# Altium PCB IR2111+IRFZ44.PcbDoc
Units mil, origin at the board's own origin, x right, y up, seen from the top; angles counter-clockwise.
Board outline 3825 x 2225 mil, 2 copper layers (Top Layer, Bottom Layer); 49 components, 32 nets, 144 pads, 82 vias.
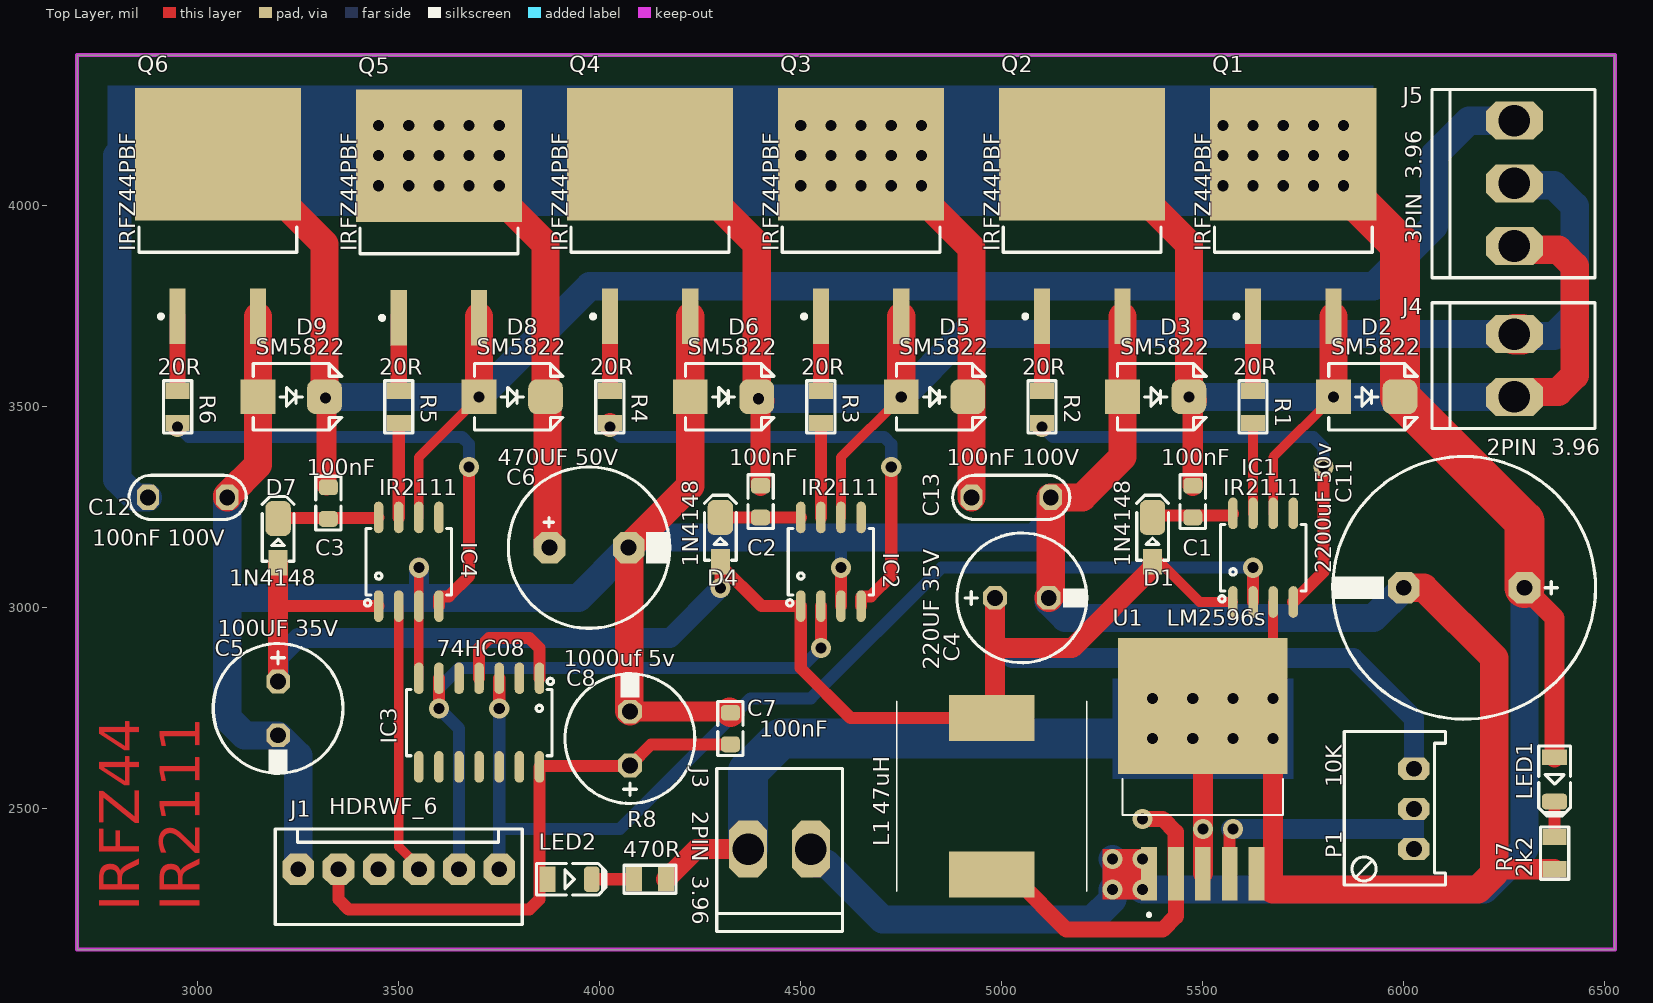
[diagram p0: Top Layer view]
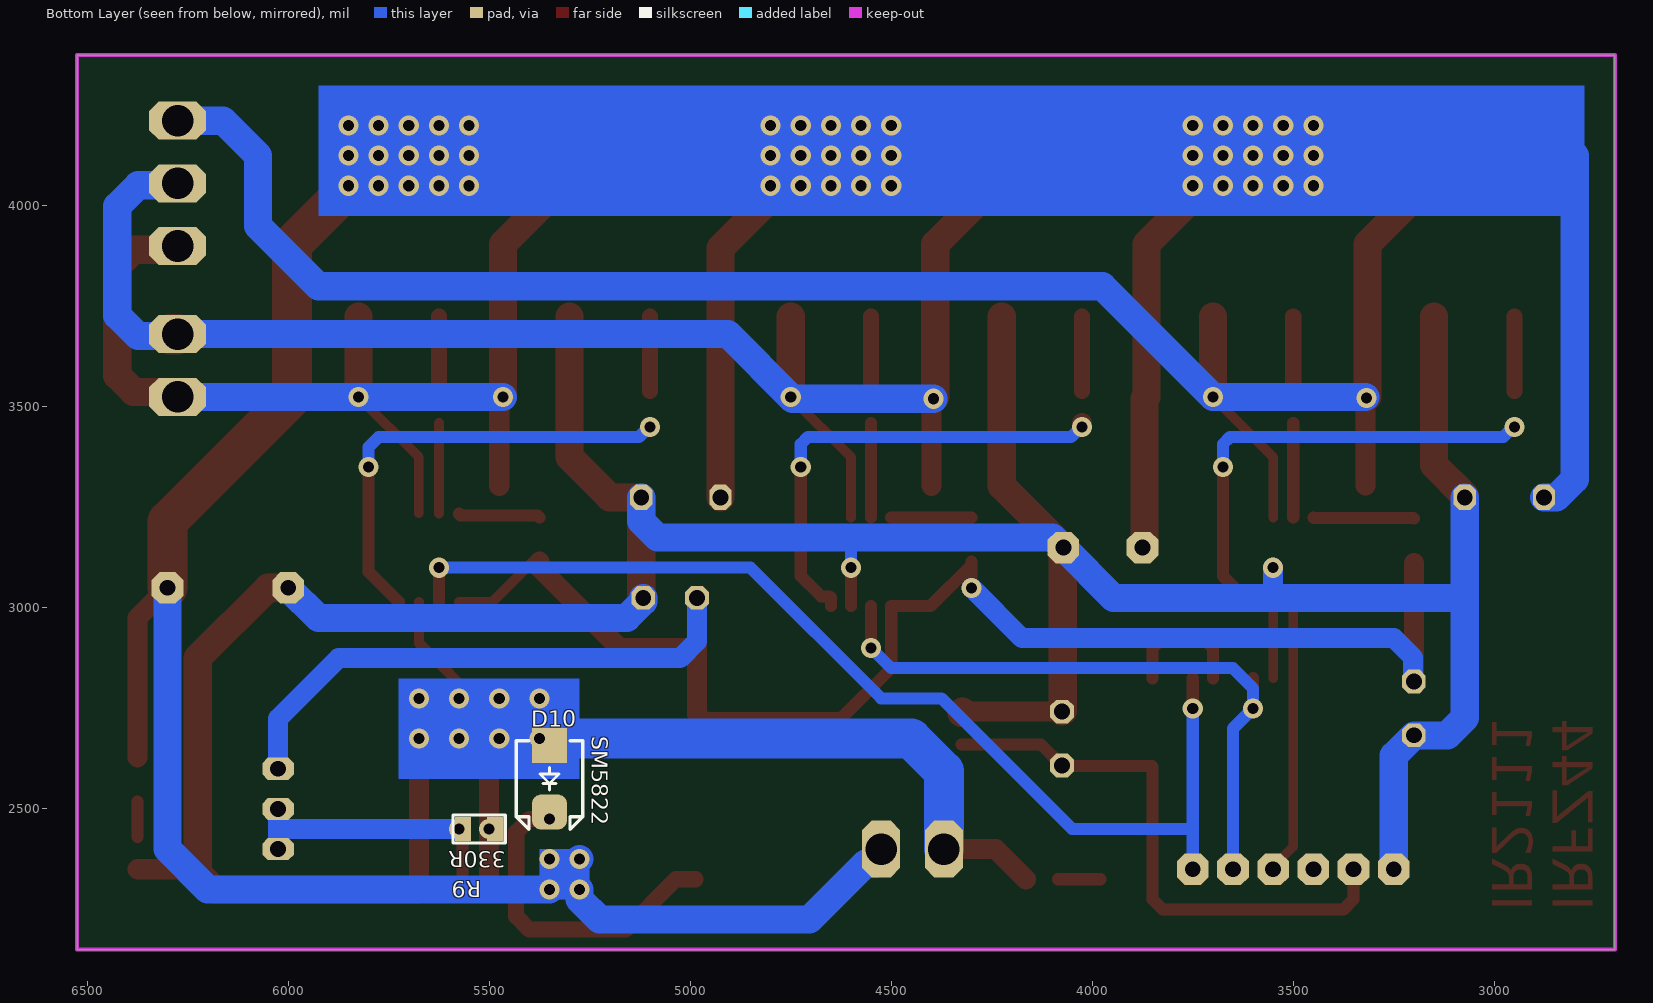
[diagram p1: Bottom Layer view, seen from below]
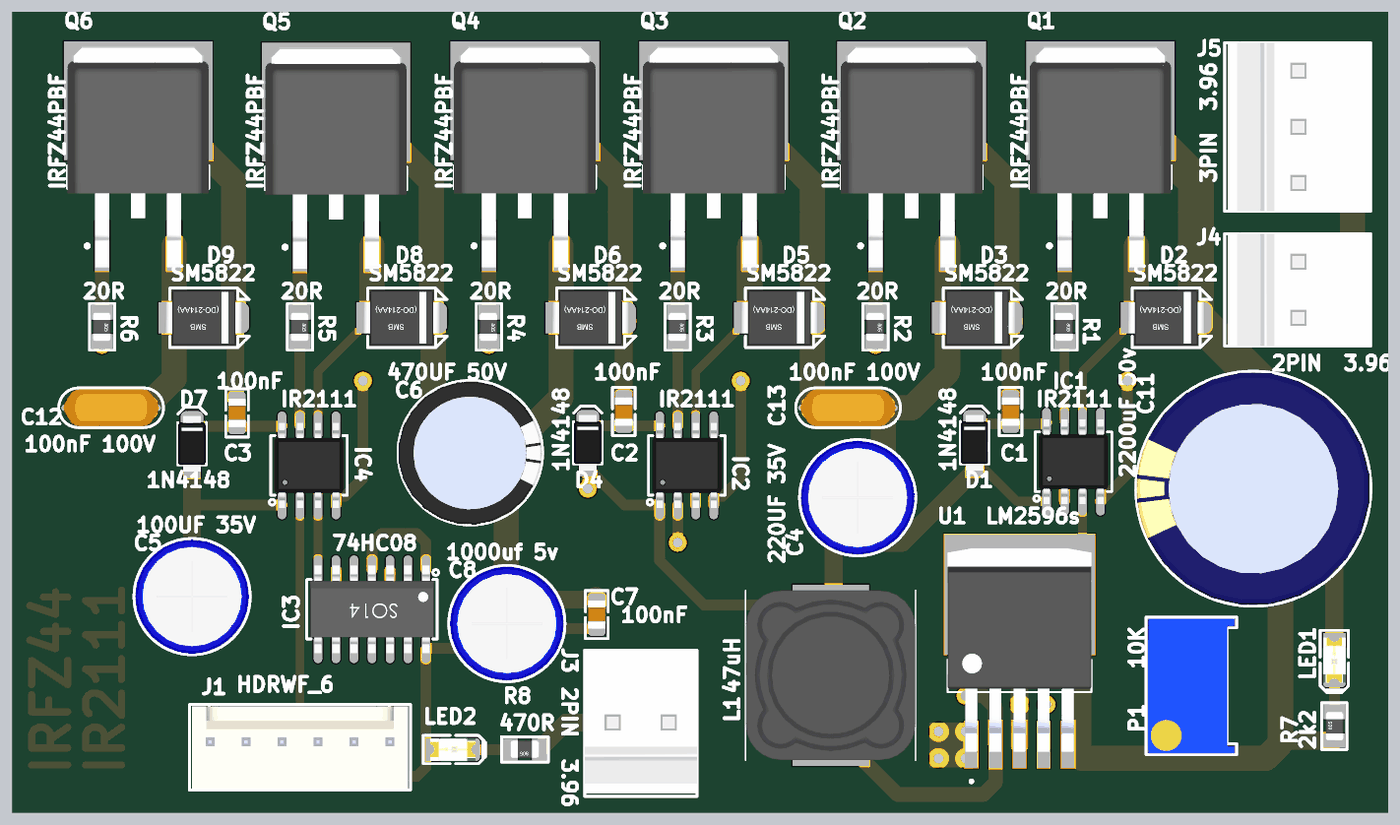
[diagram p2: 3D render of the assembled board from above, using the file's embedded part models]

## Layer stack, top to bottom
Top Solder: solder mask 0.4, Solder Resist, Dk 3.5
Top Layer: signal copper 1.4
Dielectric 1: dielectric 12.6, FR-4, Dk 4.8
Bottom Layer: signal copper 1.4
Bottom Solder: solder mask 0.4, Solder Resist, Dk 3.5

## Board outline
2700,2150 6525,2150 6525,4375 2700,4375

## Design rules (kind name [scope] priority, off if disabled: settings)
Clearance [All] p1: gap=10 ignorepadtopadclearanceinfootprint=FALSE except(0: Arc-Hole Track-Hole SMDPad-Hole THPad-Hole Via-Hole Fill-Hole Poly-Hole Region-Hole Text-Hole)
PolygonConnect [All] p1: connectstyle=Relief reliefconductorwidth=10 reliefentries=4 polygonreliefangle="90 Angle" airgapwidth=10
RoutingVias [All] p1: holewidth=28 width=50 viastyle="Through Hole" minholewidth=28 minwidth=50 maxholewidth=28 maxwidth=50
SolderMaskExpansion [All] p1: expansion=4 istentingtop=FALSE
Width [All] p1: maxlimit=100 minlimit=20 preferedwidth=40 minimp=50.000000 maximp=50.000000 favimp=50.000000
30 further rules are at their usual default settings.

## Components (designator, comment, footprint, x,y, rotation, side; value= is the part's Value field where it differs from the comment)
C1 "100nF" C0805 5475,3264.37 r270 top
C2 "100nF" C0805 4400,3264.37 r270 top
C3 "100nF" C0805 3325,3260.63 r270 top
C4 "220UF 35V" C_EL_8X12 5050,3025 r0 top
C5 "100UF 35V" C_EL_8X12 3200,2750 r270 top
C6 "470UF 50V" C_EL_10X12 3973.43,3150 r0 top
C7 "100nF" C0805 4325,2700 r270 top
C8 "1000uf 5v" C_EL_8X12 4075,2675 r90 top
C11 "2200uF 50v" C_EL_16X25 6150,3050 r180 top
C12 "100nF 100V" C_CER_D7B 2975,3275 r180 top
C13 "100nF 100V" C_CER_D7B 5023.43,3275 r180 top value=10nF
D1 "1N4148" D_SOD123W 5375,3177.76 r90 top
D2 "SM5822" D_SMB 5907.68,3525 r0 top value=?
D3 "SM5822" D_SMB 5382.68,3525 r0 top value=?
D4 "1N4148" D_SOD123W 4300,3177.76 r90 top
D5 "SM5822" D_SMB 4832.68,3525 r0 top value=?
D6 "SM5822" D_SMB 4307.68,3525 r0 top value=?
D7 "1N4148" D_SOD123W 3200,3175 r90 top
D8 "SM5822" D_SMB 3782.68,3525 r0 top value=?
D9 "SM5822" D_SMB 3232.68,3525 r0 top value=?
D10 "SM5822" D_SMB 5350,2575 r270 bottom value=?
IC1 "IR2111" SO_8 5650,3125 r90 top
IC2 "IR2111" SO_8 4575,3114.76 r90 top
IC3 "74HC08" SO_14 3700,2714.76 r270 top
IC4 "IR2111" SO_8 3525,3114.76 r90 top
J1 "HDRWF_6" WF_6 3500,2350 r180 top
J3 "2PIN  3.96" PWL_2 4447.05,2400 r180 top
J4 "2PIN  3.96" PWL_2 6275,3602.95 r90 top
J5 "3PIN  3.96" PWL_3 6275,4055.91 r90 top
L1 "47uH" CDRH127LDNP560MC-12*12 4975,2336.45 r0 top
LED1 "" LED1206RED 6375,2573.5 r270 top
LED2 "" LED1206RED 3925,2325 r0 top
P1 "10K" POT_3296W 6025,2500 r90 top
Q1 "IRFZ44PBF" D2PAK3 5725,3975 r90 top
Q2 "IRFZ44PBF" D2PAK3 5200,3975 r90 top
Q3 "IRFZ44PBF" D2PAK3 4650,3975 r90 top
Q4 "IRFZ44PBF" D2PAK3 4125,3975 r90 top
Q5 "IRFZ44PBF" D2PAK3 3600,3971.46 r90 top
Q6 "IRFZ44PBF" D2PAK3 3050,3975 r90 top
R1 "20R" R0805 5625,3500 r180 top
R2 "20R" R0805 5100,3500 r180 top
R3 "20R" R0805 4550,3500 r180 top
R4 "20R" R0805 4025,3500 r180 top
R5 "20R" R0805 3500,3500 r180 top
R6 "20R" R0805 2950,3500 r180 top
R7 "2k2" R0805 6375,2390 r0 top
R8 "470R" R0805 4125,2325 r90 top
R9 "330R" R0805 5525,2450 r270 bottom
U1 "LM2596s" "to-263-5 5d2pak LM2596S" 5500,2756.27 r90 top

## Footprints (in the part's own frame and the unit in brackets; to place one, negate y for a bottom-side part, rotate by r counter-clockwise, add the part's x,y. Pads: shape width x height; smd on the part's side, far side on the other; paste and mask are expansions set on the pad)
C0805 [mm] "CHIP Capacitor, 2.0X1.3mm, 0805"
  rrect50% 1x1.2 smd mask+0.075: 1(-1,0) 2(1,0)
  Top Layer pour cut-out: -0.5,0.8 0.5,0.8 0.5,-0.8 -0.5,-0.8
  silkscreen extent -1.7,-0.8 1.7,0.8, body extent -1,-0.62 1,0.63, height 1
C_CER_D7B [mm] "CAP, CER MULTILAYER, 7.0X2.6mm, pitch: 5.0mm"
  oct 1.4x1.6 hole 1 mask+0.075: 1(-2.5,0) 2(2.5,0)
  silkscreen extent -3.7,-1.4 3.7,1.4, body extent -3.54,-1.3 3.54,1.3, height 9.64
C_EL_8X12 [mm] "Cap Elec, D8.0X12.0H pitch: 3.5mm, RB.14/.26, RB.15/.32"
  oct 1.5x1.5 hole 1: 1(-1.7,0) 2(1.7,0)
  silkscreen extent -4.1,-4.1 4.1,4.1, body extent -4.02,-4.03 4.03,4.03, height 2.98
C_EL_10X12 [mm] "Cap Elec, D10.0X12.0H pitch: 5.0mm"
  oct 2x2 hole 1: 1(-2.5,0) 2(2.5,0)
  silkscreen extent -5.1,-5.1 5.1,5.1, body extent -5.07,-5.08 5.05,5.04, height 13.7
C_EL_16X25 [mm] "Cap Elec, D16.0X25.0H pitch: 7.6mm, RB.3/.6"
  oct 2x2 hole 1: 1(-3.81,0) 2(3.81,0)
  silkscreen extent -8.3,-8.3 8.3,8.3, body extent -8.24,-8.24 8.25,8.24, height 25.4
CDRH127LDNP560MC-12*12 [mm]
  rect 5.4x2.9 smd: 1(0,0) 2(0,9.9)
  silkscreen extent -6,-1.05 6,10.95, body extent -6,-1.05 6,10.95, height 7.8
D2PAK3 [mm] "DPAK, 3-Leads, Body 9.97x9.145mm, Pitch 2.54mm"
  rect 3.504x1.016 smd: 1(-6.35,2.54) 3(-6.35,-2.54)
  rect 8.38x10.49 smd: 2(3.9,0)
  silkscreen extent -6.47,-4.98 -0.69,4.98, body extent -7.87,-5 7.75,5, height 5.08
D_SMB [mm] "SMB Molded Diode, 2-Leads, Body 4.3x3.5mm"
  rect 2.2x2.2 smd: 1(-2.1,0)
  rrect50% 2.2x2.2 smd: 2(2.1,0)
  Top Layer pour cut-out: -1.524,2.1 -1.524,-2.1 1.524,-2.1 1.524,2.1
  silkscreen extent -2.4,-2.1 3.2,2.1, body extent -2.75,-1.95 2.75,1.95, height 2.45
D_SOD123W [mm] "PowerDI-123, SOD123, DO-213AA, 1206D"
  rect 1.6x1.2 smd mask+0.1: 1(-1.6,0)
  rrect50% 2.2x1.6 smd mask+0.1: 2(1.2,0)
  Top Layer pour cut-out: -1.016,1.1 -1.016,-1.1 1.016,-1.1 1.016,1.1
  silkscreen extent -1.5,-1 2.6,1, body extent -1.95,-0.97 1.95,0.96, height 1
LED1206RED [mm] "LED, 1206, RED"
  rect 1x1.6 smd mask+0.075: 1(-1.4,0)
  rrect50% 1x1.6 smd mask+0.075: 2(1.4,0)
  Top Layer pour cut-out: -1.1,1.1 -1.1,-1.1 1.1,-1.1 1.1,1.1
  silkscreen extent -2.1,-1 2.3,1, body extent -1.6,-0.8 1.6,0.8, height 0.68
POT_3296W [mm] "POT, TRIM, 10.0X5.0mm, pitch: 2.5mm 3299W 3296W S64W"
  oct 1.4x2 hole 1: 1(-2.54,0) 2(0,0) 3(2.54,0)
  silkscreen extent -4.8,-2 4.9,4.4, body extent -4.73,-1.85 4.8,4.25, height 11.56
PWL_2 [mm] "Connector; Header; 2 Position"
  oct 2.4x3.6 hole 2: 1(-1.98,0) 2(1.98,0)
  silkscreen extent -3.98,-5.1 3.96,5.21, body extent -3.96,-5 3.96,5, height 13.5
PWL_3 [mm] "Connector; Header; 3 Position"
  oct 2.4x3.6 hole 2: 1(-3.96,0) 2(0,0) 3(3.96,0)
  silkscreen extent -5.96,-5.1 5.94,5.21, body extent -5.94,-5 5.94,5, height 13.5
R0805 [mil]
  rect 60x40 smd: 1(0,40) 2(0,-40)
  silkscreen extent -35,-65 35,65, body extent -24,-39 26,39, height 31
SO_8 [mm] "SOP-8, 5x3.9mm body 1.27mm pitch, SOT96-1, M08A, S8, SOIC8, VO8, MS-012AA(JEDEC), R-8, 8S2, VOG8"
  oval 2x0.6 smd: 1(-2.8,1.905) 2(-2.8,0.635) 3(-2.8,-0.635) 4(-2.8,-1.905) 5(2.8,-1.905) 6(2.8,-0.635) 7(2.8,0.635) 8(2.8,1.905)
  silkscreen extent -2.8,-2.7 2.1,2.8, body extent -3,-2.45 3,2.45, height 1.7
SO_14 [mm] "SOP, SOIC, 3.9mm width, 1.27mm pitch,"
  oval 2x0.6 smd: 1(-2.8,3.81) 2(-2.8,2.54) 3(-2.8,1.27) 4(-2.8,0) 5(-2.8,-1.27) 6(-2.8,-2.54) 7(-2.8,-3.81) 8(2.8,-3.81) 9(2.8,-2.54) 10(2.8,-1.27) 11(2.8,0) 12(2.8,1.27) 13(2.8,2.54) 14(2.8,3.81)
  silkscreen extent -2.8,-4.6 2.1,4.7, body extent -3.1,-4.38 3.1,4.37, height 1.75
"to-263-5 5d2pak LM2596S" [mm]
  rect 3.4x1 smd paste-3 mask+0: 1(-10.6,3.4) 2(-10.6,1.7) 3(-10.6,0) 4(-10.6,-1.7) 5(-10.6,-3.4)
  rect 8.6x10.7 smd paste-6 mask+0: 6(0,0)
  silkscreen extent -13.3,-5.08 -4.62,5.08, body extent -11.11,-5.08 3.24,5.08, height 4.65
WF_6 [mm] "DS1070  WF, Cvilux CI31 pitch 2.54mm"
  oct 2x2 hole 1: 1(-6.35,0) 2(-3.81,0) 3(-1.27,0) 4(1.27,0) 5(3.81,0) 6(6.35,0)
  silkscreen extent -7.8,-2.55 7.8,3.5, body extent -7.62,-2.4 7.62,3.4, height 11.56

## Part data
C1 C2 C3: library part Cap, "Capacitor", LatestRevisionDate=17-Jul-2002, LatestRevisionNote="Re-released for DXP Platform.", PackageDescription="Radial Cap, Thru-Hole; 2 Leads; 0.3 in Pin Spacing", PackageReference=RAD-0.3, Published=8-Jun-2000, Publisher="Altium Limited"
C4 C5: library part CAP_ELECTRO_POLIMER
C6 C11: library part "Cap 220uF", "63VDC"
C7: library part C
C8: library part CAP3528
C12: library part "Cap 100nF"
C13: library part Cap, "63VDC", LatestRevisionDate=17-Jul-2002, LatestRevisionNote="Re-released for DXP Platform.", PackageDescription="Radial Cap, Thru-Hole; 2 Leads; 0.3 in Pin Spacing", PackageReference=RAD-0.3, Published=8-Jun-2000, Publisher="Altium Limited"
D1: library part "Diode 1N4005", Code_JEDEC=DO-204-AL, ComponentLink1Description="Manufacturer Link", ComponentLink1URL=http://www.fairchildsemi.com/, ComponentLink2Description=Datasheet, ComponentLink2URL=http://www.fairchildsemi.com/ds/1N%2F1N4001.pdf, DatasheetVersion=1998, LatestRevisionDate=17-Jul-2002, LatestRevisionNote="Re-released for DXP Platform.", PackageDescription="Diode, Axial; Body 5.2 x 2.7 mm (LxDia. max), Lead Dia. 0.86 mm (max)", PackageReference=DO-41, PackageVersion=Aug-1999, Published=8-Jun-2000, Publisher="Altium Limited"
D2 D3 D5 D6 D8 D9 D10: library part SCHOTTKY, "DIODE, SCHOTTKY, 50V, 3A", ASSEMBLY=ASSEMBLY, DESC=DESCRIPTION, MANF=DIODES, MANF_P#=1N5819HW-7-F, PARAM=40V, PARAM2=1A, Price=PRICE
D4 D7: library part "Diode 1N4005", "1 Amp General Purpose Rectifier", Code_JEDEC=DO-204-AL, ComponentLink1Description="Manufacturer Link", ComponentLink1URL=http://www.fairchildsemi.com/, ComponentLink2Description=Datasheet, ComponentLink2URL=http://www.fairchildsemi.com/ds/1N%2F1N4001.pdf, DatasheetVersion=1998, LatestRevisionDate=17-Jul-2002, LatestRevisionNote="Re-released for DXP Platform.", PackageDescription="Diode, Axial; Body 5.2 x 2.7 mm (LxDia. max), Lead Dia. 0.86 mm (max)", PackageReference=DO-41, PackageVersion=Aug-1999, Published=8-Jun-2000, Publisher="Altium Limited"
IC1 IC2 IC4: library part IR2111PBF, "Integrated Circuit", Manufacturer_Name=Infineon, Mouser Part Number=942-IR2111PBF, Arrow Part Number=IR2111PBF, Arrow Price/Stock=https://www.arrow.com/en/products/ir2111pbf/infineon-technologies-ag, Datasheet Link=https://componentsearchengine.com/Datasheets/2/IR2111PBF.pdf, Height=5.33mm, Manufacturer_Part_Number=IR2111PBF, Mouser Price/Stock=https://www.mouser.co.uk/ProductDetail/Infineon-IR/IR2111PBF?qs=dQmlx5f5cRIMSJ8myt%2FAiw%3D%3D
IC3: library part 74HC08D,652, "Integrated Circuit", Manufacturer_Name=Nexperia, Mouser Part Number=771-HC08D652, Arrow Part Number=74HC08D,652, Arrow Price/Stock=https://www.arrow.com/en/products/74hc08d652/nexperia, Datasheet Link=http://www.nxp.com/documents/data_sheet/74HC_HCT08.pdf, Height=1.75mm, Manufacturer_Part_Number=74HC08D,652, Mouser Price/Stock=https://www.mouser.co.uk/ProductDetail/Nexperia/74HC08D652?qs=P62ublwmbi%2FiQ9gkrEoLJQ%3D%3D
J1: "Header, WF, Pitch: 2.54mm"
J3 J4: library part "sip 2", "wire to board pitch 3.96 mm CH series", Contact Resistance=20mOhm, Operating Temperature="-40 to +105degC", Part Number=61300211121, Rated Current=3A, Withstanding Voltage=500VAC, Working Voltage=250VAC, ComponentLink1Description=Manufacturer, ComponentLink1URL=http://www.we-online.de, ComponentLink2Description=Datasheet, ComponentLink2URL=https://katalog.we-online.de/em/datasheet/6130xx11121.pdf, Gender=Male, Mounting Technology=THT, Orientation=Vertical, Packaging=Bag, Pin Number=2, Pitch=2.54mm, Published Date="June 2019", Publisher="Wurth Elektronik", Row Number=Single
J5: library part "sip 3", "wire to board pitch 3.96 mm CH series", Contact Resistance=20mOhm, Operating Temperature="-40 to +105degC", Part Number=61300311121, Rated Current=3A, Withstanding Voltage=500VAC, Working Voltage=250VAC, ComponentLink1Description=Manufacturer, ComponentLink1URL=http://www.we-online.de, ComponentLink2Description=Datasheet, ComponentLink2URL=https://katalog.we-online.de/em/datasheet/6130xx11121.pdf, Gender=Male, Mounting Technology=THT, Orientation=Vertical, Packaging=Bag, Pin Number=3, Pitch=2.54mm, Published Date="June 2019", Publisher="Wurth Elektronik", Row Number=Single
L1: library part CDRH127_LDNP-560MC, "Inductor", Arrow Part Number=CDRH127/LDNP-560MC, Manufacturer_Name=Sumida, Mouser Part Number=851-CDRH127LDNP560MC, Arrow Price/Stock=https://www.arrow.com/en/products/cdrh127ldnp-560mc/sumida, Datasheet Link=https://www.arrow.com/en/products/cdrh127ldnp-560mc/sumida, Height=8mm, Manufacturer_Part_Number=CDRH127/LDNP-560MC, Mouser Price/Stock=https://www.mouser.co.uk/ProductDetail/Sumida/CDRH127-LDNP-560MC?qs=IXCoV6m%252B579ap3iATSRauQ%3D%3D
LED1 LED2: library part LED3mm
P1: library part Multi-Turn, "Potentiometer"
Q1 Q2 Q3 Q4 Q5 Q6: "MOSFET (N-Channel)", Manufacturer_Name=Vishay, Mouser Part Number=844-IRFZ44PBF, Arrow Part Number=IRFZ44PBF, Arrow Price/Stock=https://www.arrow.com/en/products/irfz44pbf/vishay, Datasheet Link=https://www.vishay.com/docs/91291/91291.pdf, Height=4.65mm, Manufacturer_Part_Number=IRFZ44PBF, Mouser Price/Stock=https://www.mouser.co.uk/ProductDetail/Vishay-Semiconductors/IRFZ44PBF?qs=%2FRKvNCQzLu0R%252BpFoqVUQ5w%3D%3D
R1 R2 R3 R4 R5 R6 R9: library part Res1, "Resistor", LatestRevisionDate=17-Jul-2002, LatestRevisionNote="Re-released for DXP Platform.", PackageDescription="Axial Device, Thru-Hole; 2 Leads; 0.3 in Pin Spacing", PackageReference=AXIAL-0.3, Published=8-Jun-2000, Publisher="Altium Limited"
R7 R8: library part R

## Via types
v1: diameter 50, hole 27.56, Top Layer to Bottom Layer, 82 vias

## Nets (pads, with @x,y where several pads share a name; then routed paths per layer and width w, separated by ;. In a path a pad name is that pad's centre, name@x,y a point inside that pad or via, vN(x,y) a via of type N, cw(c..) or ccw(c..) an arc to the next point about the centre after c; other vN are vias at no path point)
5V: C7.2 C8.1 IC3.14 J1.5 LED2.1 | length 1423.5
  Top Layer w30: J1.5 3350,2275 3375,2250 3825,2250 3850,2275 IC3.14 3851.77,2606.3 4073.23,2606.3 C8.1 4075.29,2608.07 4127.85,2660.63 C7.2
15V: C4.1 C5.1 D1.1 D4.1 D7.1 IC1.1 IC2.1 IC4.1 L1.2 P1.3 | length 5137.6
  Top Layer w25: D1.1@5390.94,3115.94 5492.13,3014.76 IC1.1
  Top Layer w30: 3200,3000 3204.52,3004.53 IC4.1 ; v1(4300,3050) D4.1@4300,3106.89 ; D4.1 D4.1@4300,3106.89 ; L1.2 4623.79,2726.21 4500,2850 IC2.1 4402.36,3004.53 D4.1@4300,3106.89
  Top Layer w50: C5.1 3200,3000 D7.1 ; L1.2 4983.07,2734.28 4983.07,2900 ; C4.1 4983.07,2900 ; D1.1 5375,3100 5175,2900 4983.07,2900
  Bottom Layer w50: C5.1 3201.73,2818.66 3201.73,2876.73 3250,2925 4175,2925 v1(4300,3050) ; C4.1 4983.07,2916.93 5025,2875 5875,2875 6025,2725 P1.3
24V: C6.1 C11.1 C12.2 C13.2 D2.2 D5.2 D8.2 J3.1 LED1.1 Q1.2 Q3.2 Q5.2 U1.1 | length 10293.8
  Top Layer w50: C11.1 6375,2975 LED1.1
  Top Layer w70: Q5.2@3641.54,4128.54 3865.35,3904.72 D8.2 3870.18,3520.18 3870.18,3154.82 C6.1 ; v1(4650,4125) Q3.2 4691.54,4128.54 4925,3895.08 4925,3525 C13.2
  Top Layer w100: Q1.2 5766.54,4128.54 5990.35,3904.72 D2.2 6300,3215.35 C11.1
  Bottom Layer w70: C12.2 2844.94,3275 2800,3319.94 2800,4125 v1(3600,4125) v1(5700,4125) ; J3.1 4525,2376.38 4537.24,2364.13 4564.12,2364.13 4703.25,2225 5225,2225 5275,2275 v1(5275,2300) 5312.5,2337.5 v1(5275,2375) ; v1(5350,2300) 6200,2300 6300,2400 C11.1
  other v1: 5350,2375 3450,4050 3525,4050 3600,4050 3675,4050 3750,4050 4500,4050 4575,4050 4650,4050 4725,4050 4800,4050 5550,4050 5625,4050 5700,4050 5775,4050 5850,4050 3450,4125 3525,4125 3600,4125 3675,4125 3750,4125 4500,4125 4575,4125 4650,4125 4725,4125 4800,4125 5550,4125 5625,4125 5700,4125 5775,4125 5850,4125 3450,4200 3525,4200 3600,4200 3675,4200 3750,4200 4500,4200 4575,4200 4650,4200 4725,4200 4800,4200 5550,4200 5625,4200 5700,4200 5775,4200 5850,4200
GND: C4.2 C5.2 C6.2 C7.1 C8.2 C11.2 C12.1 C13.1 D3.1 D6.1 D9.1 D10.1 IC1.3 IC2.3 IC3.7 IC4.3 J1.6 J3.2 Q2.3 Q4.3 Q6.3 R7.2 R8.2 R9.1 U1.3 U1.5 U1.6 | length 11261.5
  Top Layer w24: IC3.7 IC4.3 v1(3550,3100)
  Top Layer w25: U1.6 5518.21,2756.27 5675,2913.06 IC1.3
  Top Layer w30: IC2.3 v1(4600,3100)
  Top Layer w50: C8.2 C7.1@4322.44,2741.93 ; R8.2 4240,2400 J3.2 ; U1.3 v1(5500,2450) U1.6 U1.6@5633.86,2622.41 ; 6225,2350 R7.2
  Top Layer w70: C12.1 3073.43,3278.94 3150,3355.51 D9.1 Q6.3 ; C8.2 4073.43,2743.51 4073.43,3148.42 C6.2 4225,3303.15 D6.1 Q4.3 ; C7.1@4322.44,2741.93 C7.1 ; C4.2 5116.93,3027.44 5121.85,3032.37 C13.1 5200,3275 5300,3375 D3.1 Q2.3 ; 5675,2300 6183.99,2300 6225,2341.01 6225,2350 6225,2875 6050,3050 C11.2
  Bottom Layer w30: v1(4600,3100) 4600,3175
  Bottom Layer w50: 3550,3025 v1(3550,3100)
  Bottom Layer w70: C12.1 3073.43,3025 ; J1.6 3250,2633.06 C5.2 3116.93,2683.07 3073.43,2726.57 3073.43,3025 ; C4.2 5116.93,3016.01 5157.93,2975 5925,2975 C11.2 ; C13.1 5121.85,3216.01 5080.85,3175 4600,3175 4099.22,3175 4074.22,3150 C6.2 3946.85,3025 3550,3025 3073.43,3025
  Bottom Layer w100: J3.2 4369.09,2594.09 4450,2675 v1(5375,2675)
  other v1: 5475,2675 5575,2675 5675,2675 5375,2775 5475,2775 5575,2775 5675,2775
IN-A: IC1.2 IC3.3 J1.1 | length 2704.5
  Top Layer w30: v1(3750,2750) IC3.3 ; IC1.2 v1(5625,3100)
  Bottom Layer w30: J1.1 3750,2450 ; v1(3750,2750) 3750,2450 ; v1(5625,3100) 4850,3100 4525,2775 4375,2775 4050,2450 3750,2450
IN-B: IC2.2 IC3.6 J1.2 | length 1641.7
  Top Layer w30: v1(3600,2750) IC3.6 ; v1(4550,2900) IC2.2
  Bottom Layer w30: J1.2 3650,2700 v1(3600,2750) 3600,2800 3650,2850 4500,2850 v1(4550,2900)
IN-C: IC4.2 J1.3 | length 675.2
  Top Layer w24: IC4.2 3500,2406.59 3550,2356.59 J1.3
Motor-A: C1.1 D2.1 D3.2 IC1.6 J4.1 J5.1 Q1.3 Q2.2 | length 2980.6
  Top Layer w24: IC1.6 5675,3375 v1(5825,3525)
  Top Layer w50: C1.1 D3.2@5475,3515.35
  Top Layer w70: Q2.2@5158.46,4128.54 Q2.2 5241.54,4128.54 5465.35,3904.72 v1(5465.35,3525) D3.2@5475,3515.35 ; v1(5825,3525) Q1.3 ; J4.1 6287.24,3537.24 6383.99,3537.24 6425,3578.25 6425,3850 6383.99,3891.01 6283.99,3891.01 J5.1
  Bottom Layer w70: v1(5465.35,3525) v1(5825,3525) J4.1
Motor-B: C2.1 D5.1 D6.2 IC2.6 J4.2 J5.2 Q3.3 Q4.2 | length 4116.9
  Top Layer w24: IC2.6 4600,3375 v1(4750,3525)
  Top Layer w50: C2.1 D6.2@4400,3515.35
  Top Layer w70: Q4.2@4119.09,4134.45 Q4.2 4166.54,4128.54 4390.35,3904.72 D6.2 v1(4395.18,3520.18) D6.2@4400,3515.35 ; v1(4750,3525) Q3.3
  Top Layer w100: J4.2 J4.2@6293.11,3680.91
  Bottom Layer w70: v1(4395.18,3520.18) 4745.18,3520.18 4905.91,3680.91 J4.2 6279.69,3676.22 6373.78,3676.22 6425,3727.44 6425,4000 6373.78,4051.22 6279.69,4051.22 J5.2
Motor-C: C3.1 D8.1 D9.2 IC4.6 J5.3 Q5.3 Q6.2 | length 5015.6
  Top Layer w24: IC4.6 3550,3375 v1(3700,3525)
  Top Layer w30: D9.2 v1(3317.77,3522.59) D9.2@3320.18,3520.18 ; C3.1@3320.18,3304.69 3324.86,3300 C3.1
  Top Layer w50: Q6.2 Q6.2@3091.54,4128.54 ; C3.1@3320.18,3304.69 D9.2@3320.18,3520.18
  Top Layer w70: Q6.2 Q6.2@3150,4228.54 ; Q6.2@3091.54,4128.54 3315.35,3904.72 D9.2 ; v1(3700,3525) Q5.3 Q5.3@3700,3725
  Bottom Layer w50: v1(3317.77,3522.59) v1@3320.18,3525
  Bottom Layer w70: v1@3320.18,3525 v1(3700,3525) 3975,3800 5925,3800 6075,3950 6075,4125 6161.81,4211.81 J5.3
Motor-Direct: IC3.5
NetC1_2: C1.2 D1.2 IC1.8 | length 205.4
  Top Layer w30: D1.2 5380.12,3230.12 5571.81,3230.12 5575,3233.31 IC1.8
NetC2_2: C2.2 D4.2 IC2.8 | length 200
  Top Layer w30: D4.2 C2.2 IC2.8
NetC3_2: C3.2 D7.2 IC4.8 | length 251.1
  Top Layer w30: D7.2 3201.38,3223.62 3448.62,3223.62 IC4.8
NetD10_2: D10.2 L1.1 U1.2 | length 817.7
  Top Layer w40: L1.1@4986.45,2325 5035.66,2325 5160.66,2200 5400,2200 5433.07,2233.07 U1.2 5432.76,2339.26 5432.76,2442.24 5400,2475 v1(5350,2475)
NetIC1_4: IC1.4 R2.1 | length 1147
  Top Layer w30: v1(5100,3450) R2.1 ; IC1.4 5800,3089.76 v1(5800,3350)
  Bottom Layer w30: v1(5100,3450) 5102.57,3450 5127.57,3425 5775,3425 5800,3400 v1(5800,3350)
NetIC1_7: IC1.7 R1.1 | length 224.8
  Top Layer w25: IC1.7 R1.1
NetIC2_4: IC2.4 R4.1 | length 1174
  Top Layer w30: IC2.4 4650,3025.71 4653.19,3028.9 4674.37,3028.9 4725,3079.53 v1(4725,3350)
  Top Layer w50: v1(4025,3450) R4.1
  Bottom Layer w30: v1(4025,3450) 4027.57,3450 4052.57,3425 4707.43,3425 4725,3407.43 v1(4725,3350)
NetIC2_7: IC2.7 R3.1 | length 235
  Top Layer w30: IC2.7 R3.1
NetIC4_4: IC4.4 R6.1 | length 1199
  Top Layer w30: v1(2950,3450) R6.1 ; IC4.4 3600,3025.71 3603.19,3028.9 3624.37,3028.9 3675,3079.53 v1(3675,3350)
  Bottom Layer w30: v1(2950,3450) 2952.57,3450 2977.57,3425 3657.43,3425 3675,3407.43 v1(3675,3350)
NetIC4_7: IC4.7 R5.1 | length 235
  Top Layer w30: IC4.7 R5.1
NetLED1_2: LED1.2 R7.1 | length 88.4
  Top Layer w30: R7.1 LED1.2
NetLED2_2: LED2.2 R8.1 | length 104.9
  Top Layer w30: LED2.2 R8.1
NetP1_1: P1.1 P1.2 R9.2 U1.4 | length 656.6
  Top Layer w30: U1.4 5566.93,2441.93 v1(5575,2450)
  Bottom Layer w50: R9.2@5570,2450 6012.21,2450 ; P1.1 6025,2450 P1.2
NetQ1_1: Q1.1 R1.2 | length 185
  Top Layer w40: R1.2 Q1.1
NetQ2_1: Q2.1 R2.2 | length 185
  Top Layer w40: R2.2 Q2.1
NetQ3_1: Q3.1 R3.2 | length 185
  Top Layer w40: R3.2 Q3.1
NetQ4_1: Q4.1 R4.2 | length 185
  Top Layer w40: R4.2 Q4.1
NetQ5_1: Q5.1 R5.2 | length 185
  Top Layer w40: R5.2 Q5.1@3500,3725
NetQ6_1: Q6.1 R6.2 | length 185
  Top Layer w40: R6.2 Q6.1
PWMA: IC3.1 IC3.4 | length 320.7
  Top Layer w30: IC3.4 3700,2900 3725,2925 3825,2925 3850,2900 IC3.1
PWMB/direct2: IC3.2
pads on no net: IC1.5 IC2.5 IC3.8 IC3.9 IC3.10 IC3.11 IC3.12 IC3.13 IC4.5 J1.4

## Keep-outs
Keep-Out Layer:
  the board outline again, w10

## Other copper
Top Layer:
  rectangle net GND: 5650,2275 5700,2600
  rectangle net 24V: 5250,2275 5375,2400
  text "IRFZ44" at 2855,2245 h100 r90
  text "IR2111" at 3005,2245 h100 r90
Bottom Layer:
  rectangle net 24V: 2775,3975 5925,4300
  rectangle net GND: 5275,2575 5725,2825
  rectangle net 24V: 5250,2275 5375,2400